# Altium PCB HS-1025_MAIN_PCB增加测试点修改_2025-04-26.pcbdoc (part 1 of 2)
Units mm, origin at the board's own origin, x right, y up, seen from the top; angles counter-clockwise.
Board outline 70 x 96.4 mm, 2 copper layers (Top Layer, Bottom Layer); 113 components, 41 nets, 228 pads, 296 vias.
Unrouted connection lines stored in the file: 1.
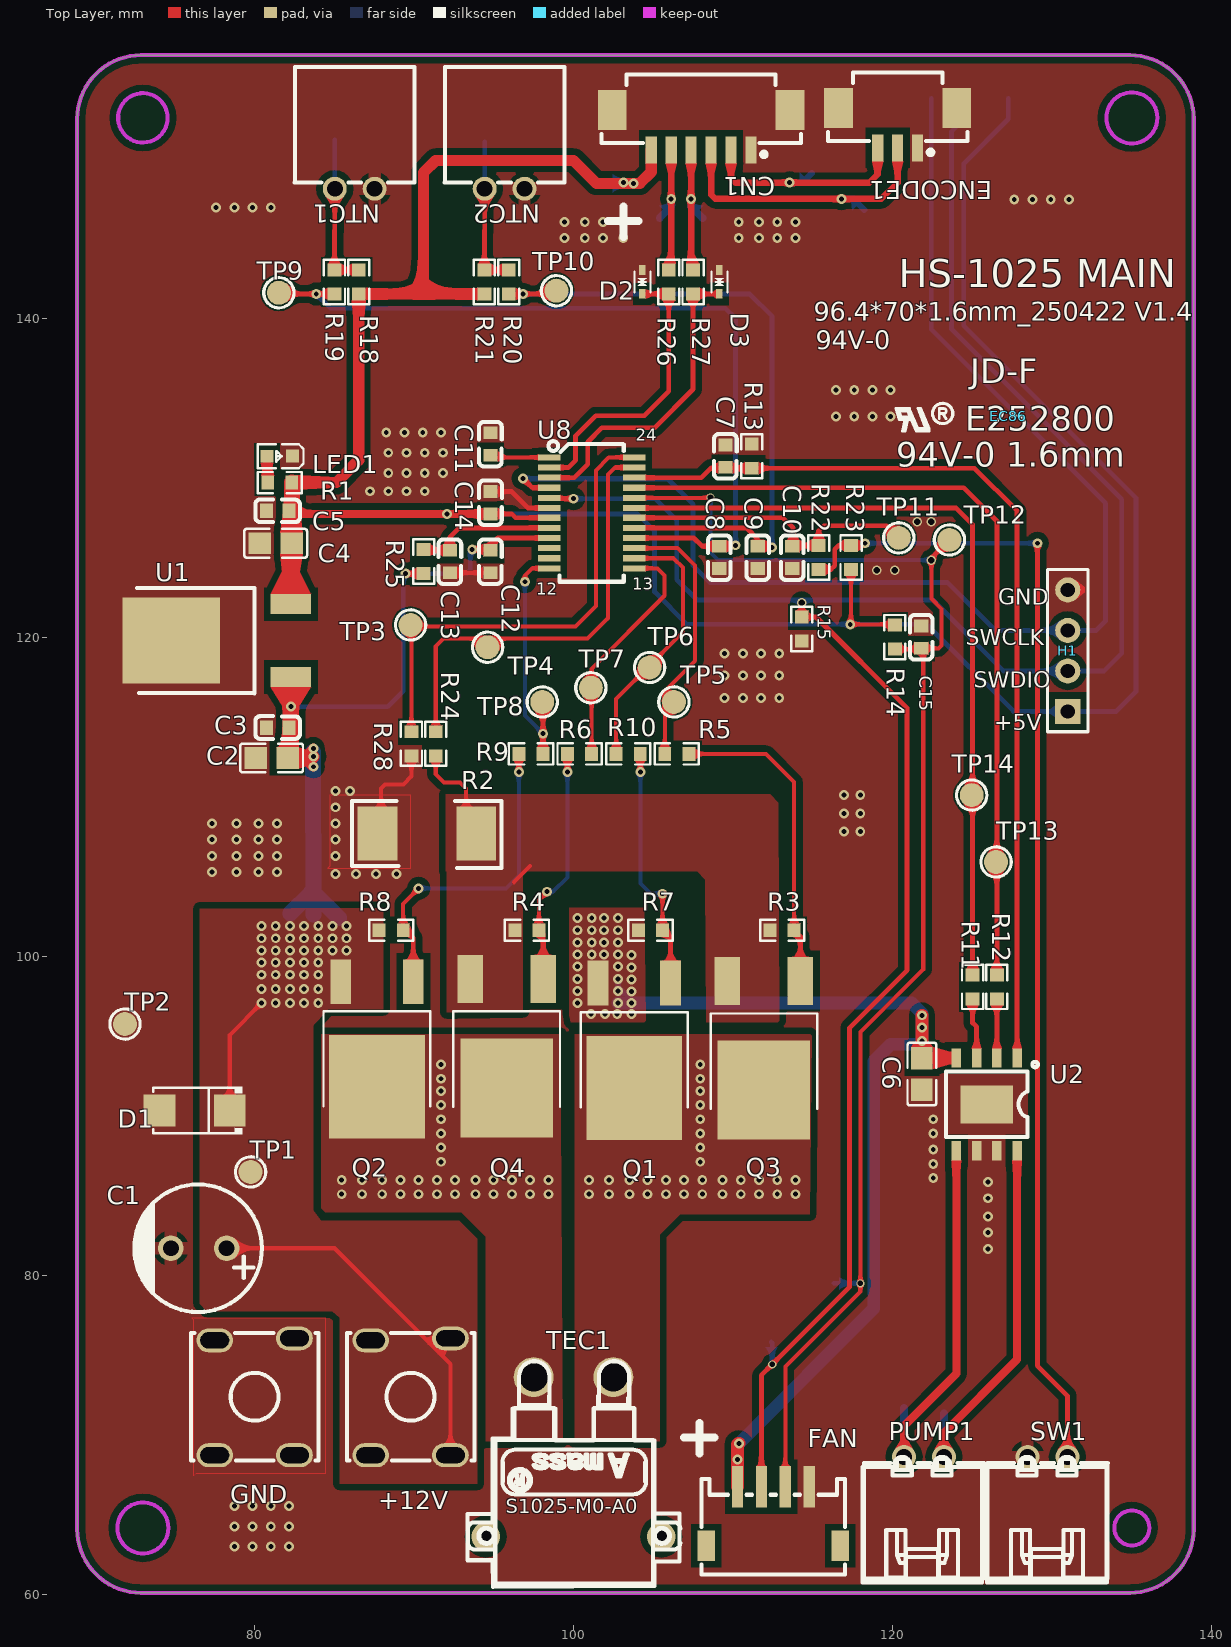
[diagram p0: Top Layer view]
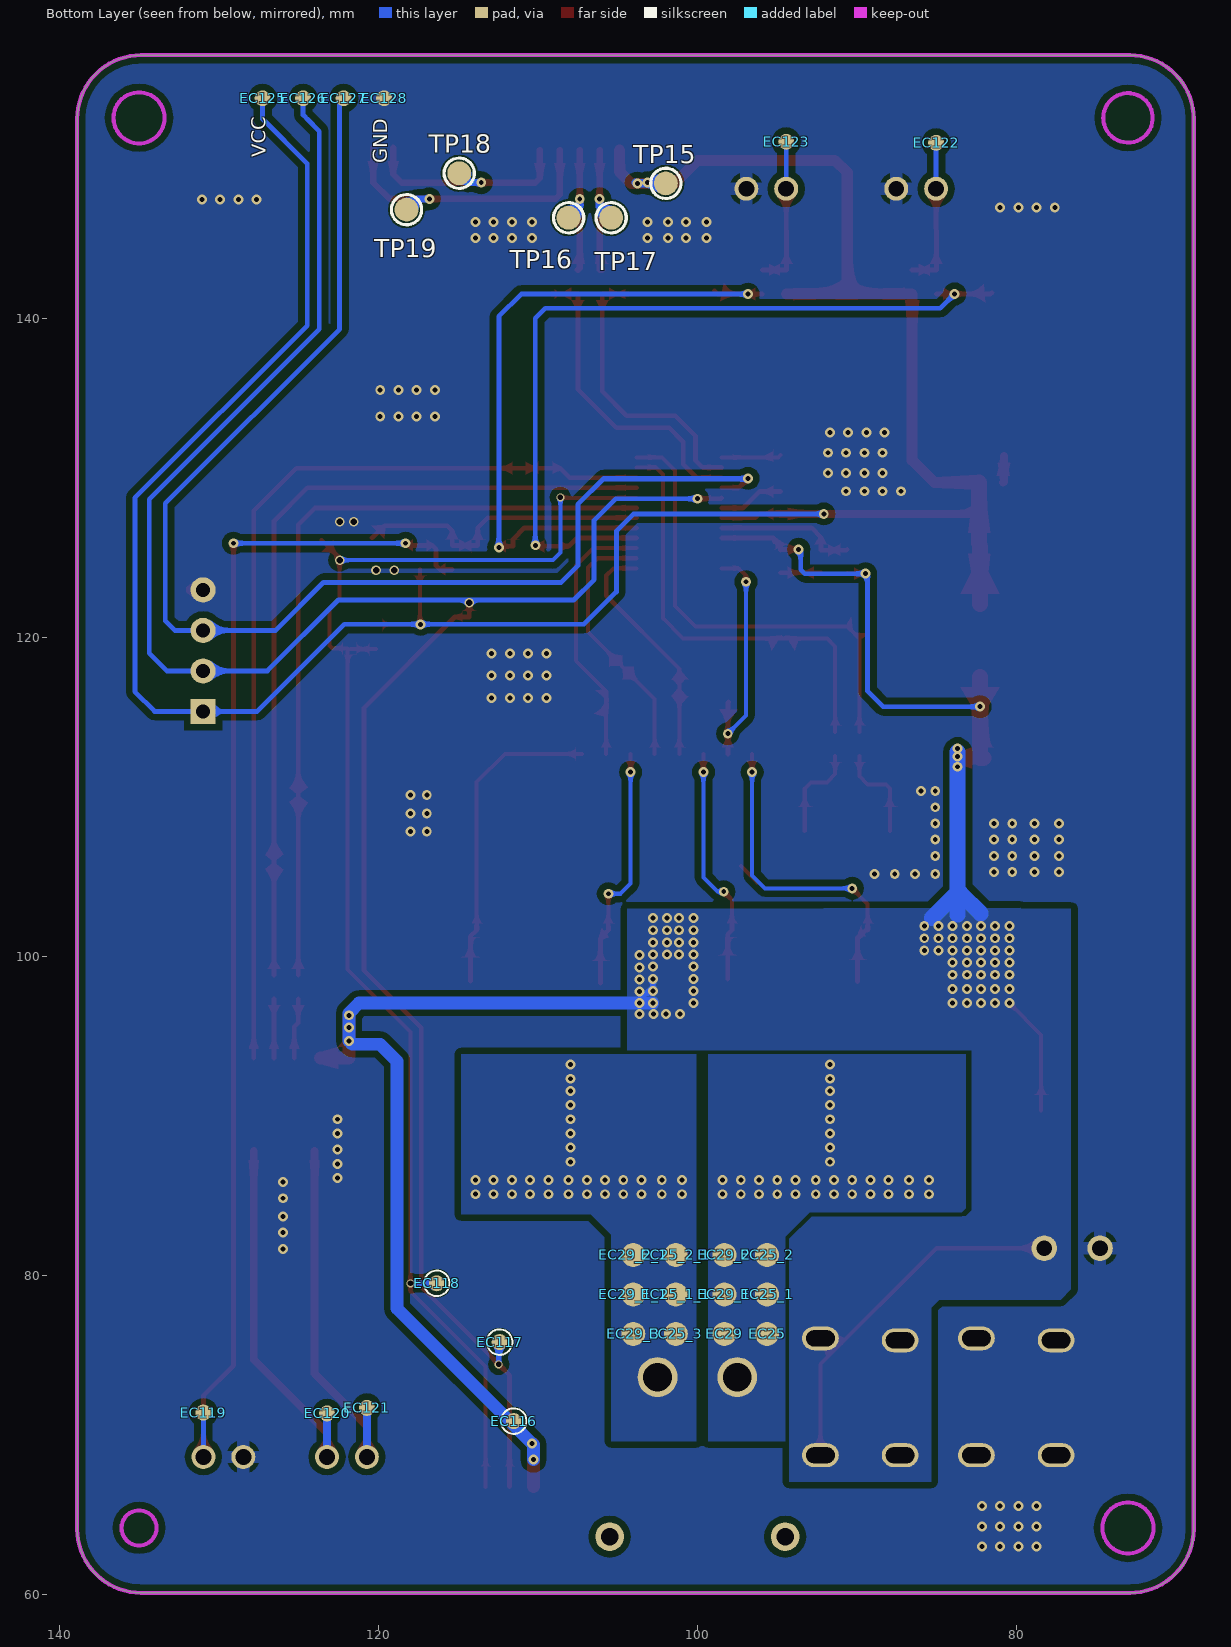
[diagram p1: Bottom Layer view, seen from below]

## Layer stack, top to bottom
Top Solder: solder mask 0.0102, Solder Resist, Dk 3.5
Top Layer: signal copper 0.0356
Dielectric1: dielectric 0.32, FR-4, Dk 4.8
Bottom Layer: signal copper 0.0356
Bottom Solder: solder mask 0.0102, Solder Resist, Dk 3.5

## Board outline
68.878,64.099 ccw(c72.88,64.1) 72.878,60.099 134.878,60.099 ccw(c134.879,64.099) 138.878,64.099 138.878,152.499 ccw(c134.88,152.501) 134.878,156.499 72.878,156.499 ccw(c72.878,152.499) 68.878,152.499 68.879,152.499

## Design rules (kind name [scope] priority, off if disabled: settings)
BoardOutlineClearance [All] p1: gap=0.254 except(0: Arc-SplitContinuation Track-SplitContinuation SMDPad-SplitContinuation THPad-SplitContinuation Via-SplitContinuation Fill-SplitContinuation Poly-SplitContinuation Region-SplitContinuation Text-SplitContinuation; 0.5: Arc-OutlineEdge)
Clearance [All] p1: gap=0.4
PlaneConnect [All] p1: planeconnectstyle=Direct reliefexpansion=0.508 reliefentries=4 reliefconductorwidth=0.254 reliefairgap=0.254
PolygonConnect PolygonConnect_1 [(InComponent('C1')AND InNet('GND')) + (InComponent('NTC1')AND InNet('GND')) +(InComponent('NTC2')AND InNet('GND'))+(InComponent('SW1')AND InNet('GND'))] p1: connectstyle=Relief reliefconductorwidth=0.8 reliefentries=4 polygonreliefangle="90 Angle" airgapwidth=0.3
PolygonConnect [All] p2: connectstyle=Direct reliefconductorwidth=0.254 reliefentries=4 polygonreliefangle="90 Angle" airgapwidth=0.254
RoutingVias [All] p1: holewidth=0.711 width=1.27 viastyle="Through Hole" minholewidth=0.711 minwidth=1.27 maxholewidth=0.711 maxwidth=1.27
SolderMaskExpansion [All] p1: expansion=0.102
Width [All] p1: maxlimit=10 minlimit=0.254 preferedwidth=0.254
29 further rules are at their usual default settings.

## Classes and differential pairs
component class MAIN_250314: +12V C1 C2 C3 C4 C5 C6 C7 C8 C9 C10 C11 C12 C13 C14 C15 CN1 D1 D2 D3 ENCODE1 FAN GND H1 LED1 NTC1 NTC2 PUMP1 Q1 Q2 Q3 Q4 R1 R2 R3 R4 R5 R6 R7 R8 R9 R10 R11 R12 R13 R14 R15 R18 R19 R20 R21 R22 R23 R24 R25 R26 R27 R28 SW1 TEC1 TP1 TP2 TP3 TP4 TP5 TP6 TP7 TP8 TP9 TP10 TP11 TP12 TP13 TP14 TP15 TP16 TP17 TP18 TP19 U1 U2 U8
pad class "New Class": C1-2 NTC1-1 NTC2-1

## Components (designator, comment, footprint, x,y, rotation, side; value= is the part's Value field where it differs from the comment)
+12V "T34080080-0680" CONN-TH_T34080080-0680 89.781,72.39 r270 top
C1 "330uF" CAP-TH_BD8.0-P3.50-D0.6-FD 76.5,81.702 r180 top
C2 "22uF" C0805 81.072,112.436 r0 top
C3 "100nF" C0603 81.453,114.341 r0 top
C4 "22uF" C0805 81.326,125.898 r0 top
C5 "100nF" C0603 81.453,127.93 r0 top
C6 "22uF" C0805 121.839,92.624 r90 top
C7 "100nF" C0603 109.52,131.359 r90 top
C8 "100nF" C0603 109.139,125.009 r90 top
C9 "100nF" C0603 111.552,125.009 r90 top
C10 "100nF" C0603 113.711,125.009 r90 top
C11 "100nF" C0603 94.788,132.121 r90 top
C12 "1uF" C0603 94.788,124.755 r90 top
C13 "1uF" C0603 92.248,124.755 r90 top
C14 "1uF" C0603 94.788,128.438 r270 top
C15 "0.01UF" C0603 121.793,120.015 r90 top
CN1 "ZX-MX1.25-6PWT" CONN-SMD_6P-P1.25_MEGASTAR_ZX-MX1.25-6PWT 107.996,151.806 r0 top
D1 "SMAJ14A_C908768" SMA_L4.3-W2.6-LS5.1-RD 76.246,90.338 r180 top
D2 "PESD3V3S1BA-N" SOD-523_L1.2-W0.8-LS1.6-BI 104.313,142.281 r270 top
D3 "PESD3V3S1BA-N" SOD-523_L1.2-W0.8-LS1.6-BI 109.139,142.281 r270 top
EC25 "Comment" Test-Point-0.5mm#1 144.018,77.343 r180 bottom
EC25_1 "Comment" Test-Point-0.5mm#1 144.018,79.819 r180 bottom
EC25_1_1 "Comment" Test-Point-0.5mm#1 149.733,79.819 r180 bottom
EC25_2 "Comment" Test-Point-0.5mm#1 144.018,82.296 r180 bottom
EC25_2_1 "Comment" Test-Point-0.5mm#1 149.733,82.296 r180 bottom
EC25_3 "Comment" Test-Point-0.5mm#1 149.733,77.343 r180 bottom
EC26 "Comment" Test-Point-0.5mm#2 144.018,80.637 r180 bottom
EC27 "Comment" Test-Point-0.5mm#2 150.241,77.343 r180 bottom
EC28 "Comment" Test-Point-0.5mm#2 150.114,80.637 r180 bottom
EC29 "Comment" Test-Point-0.5mm#3 110.236,71.755 r180 bottom
EC29_1 "Comment" Test-Point-0.5mm#3 110.236,74.231 r180 bottom
EC29_1_1 "Comment" Test-Point-0.5mm#3 115.951,74.231 r180 bottom
EC29_2 "Comment" Test-Point-0.5mm#3 110.236,76.708 r180 bottom
EC29_2_1 "Comment" Test-Point-0.5mm#3 115.951,76.708 r180 bottom
EC29_3 "Comment" Test-Point-0.5mm#3 115.951,71.755 r180 bottom
EC30 "Comment" Test-Point-0.5mm#2 149.098,76.2 r180 bottom
EC85 "Comment" 版本修改 69.977,174.752 r0 top
EC86 "Comment" JD2 127.254,133.858 r0 top
EC87 "Comment" 工艺要求FR4双面 112.141,30.988 r0 top
EC116 "Comment" 1.0MM测试点 111.506,70.866 r180 bottom
EC117 "Comment" 1.0MM测试点 112.395,75.819 r180 bottom
EC118 "Comment" 1.0MM测试点 116.332,79.502 r180 bottom
EC119 "Comment" Test-Point-1.0mm 130.963,71.4 r180 bottom
EC120 "Comment" Test-Point-1.0mm 123.216,71.348 r180 bottom
EC121 "Comment" Test-Point-1.0mm 120.716,71.694 r180 bottom
EC122 "Comment" Test-Point-1.0mm 85.029,151.003 r180 bottom
EC123 "Comment" Test-Point-1.0mm 94.427,151.069 r180 bottom
EC125 "Comment" Test-Point-1.0mm 127.254,153.797 r270 bottom
EC126 "Comment" Test-Point-1.0mm 124.714,153.797 r270 bottom
EC127 "Comment" Test-Point-1.0mm 122.174,153.797 r270 bottom
EC128 "Comment" Test-Point-1.0mm 119.634,153.797 r270 bottom
ENCODE1 "ZX-MX1.25-3PWT" CONN-SMD_3P-P1.25_MEGASTAR_ZX-MX1.25-3PWT 120.315,151.933 r180 top
FAN "CON4" CONN-SMD_4P-P1.50_HC-ZH-4PW 112.522,64.897 r180 top
GND "T34080080-0680" CONN-TH_T34080080-0680 80.003,72.391 r270 top
H1 "HDR-F-2.54_1x4" HDR-F-2.54_1X4 130.983,119.167 r90 top
LED1 "XL-1608SURC-06" LED0603-RD_RED 81.58,131.359 r180 top
NTC1 "XY-XHB2.54-2A21" HDR-TH_2P-P2.50-H-F-W7.3-N 86.279,148.123 r180 top
NTC2 "XY-XHB2.54-2A21" HDR-TH_2P-P2.50-H-F-W7.3-N 95.677,148.123 r180 top
PUMP1 "XY-XHB2.54-2A21" HDR-TH_2P-P2.50-H-F-W7.3-N 121.966,68.621 r0 top
Q1 "HY19P03D" TO-252-2_L6.6-W6.1-P4.57-LS9.9-TL-CW 103.805,95.037 r270 top
Q2 "HY19P03D" TO-252-2_L6.6-W6.1-P4.57-LS9.9-TL-CW 87.676,95.112 r270 top
Q3 "MDD50N03D" TO-252-2_L6.6-W6.1-P4.57-LS9.9-BR-CW 111.933,95.037 r90 top
Q4 "MDD50N03D" TO-252-2_L6.6-W6.1-P4.57-LS9.9-BR-CW 95.804,95.164 r90 top
R1 "1kΩ" R0603 81.58,129.708 r180 top
R2 "5mΩ" RES-SMD_L6.4-W3.2-1 90.797,107.696 r0 top
R3 "10kΩ" R0603 113.076,101.641 r0 top
R4 "10kΩ" R0603 97.074,101.641 r0 top
R5 "51Ω" R0603 106.471,112.69 r0 top
R6 "51Ω" R0603 100.375,112.69 r0 top
R7 "10kΩ" R0603 104.821,101.641 r0 top
R8 "10kΩ" R0603 88.565,101.641 r0 top
R9 "51Ω" R0603 97.327,112.69 r0 top
R10 "51Ω" R0603 103.423,112.69 r0 top
R11 "51Ω" R0603 125.013,98.085 r270 top
R12 "51Ω" R0603 126.537,98.085 r270 top
R13 "10kΩ" R0603 111.171,131.359 r90 top
R14 "2.4K" R0603 120.142,120.015 r270 top
R15 "NC" r0603 114.3,120.523 r90 top
R18 "10kΩ" R0603 86.533,142.281 r270 top
R19 "1kΩ" R0603 85.009,142.281 r90 top
R20 "1kΩ" R0603 95.931,142.281 r90 top
R21 "10kΩ" R0603 94.407,142.281 r270 top
R22 "1kΩ" R0603 115.362,125.009 r270 top
R23 "10kΩ" R0603 117.394,125.009 r270 top
R24 "1kΩ" R0603 91.359,113.325 r90 top
R25 "1kΩ" R0603 90.597,124.755 r90 top
R26 "100Ω" R0603 105.964,142.281 r270 top
R27 "100Ω" R0603 107.488,142.281 r270 top
R28 "1kΩ" R0603 89.835,113.325 r90 top
SW1 "XY-XHB2.54-2A21" HDR-TH_2P-P2.50-H-F-W7.3-N 129.713,68.621 r0 top
TEC1 "XT30PW-M" CONN-TH_XT30PW-M 99.995,68.621 r0 top
TP1 "TP-1.5MM" TP_1.5MM 79.748,86.487 r0 top
TP2 "TP-1.5MM" TP_1.5MM 71.874,95.758 r0 top
TP3 "TP-1.5MM" TP_1.5MM 89.781,120.777 r0 top
TP4 "TP-1.5MM" TP_1.5MM 94.607,119.38 r0 top
TP5 "TP-1.5MM" TP_1.5MM 106.291,115.951 r0 top
TP6 "TP-1.5MM" TP_1.5MM 104.767,118.11 r0 top
TP7 "TP-1.5MM" TP_1.5MM 101.084,116.84 r0 top
TP8 "TP-1.5MM" TP_1.5MM 98.036,115.951 r0 top
TP9 "TP-1.5MM" TP_1.5MM 81.526,141.605 r0 top
TP10 "TP-1.5MM" TP_1.5MM 98.925,141.732 r0 top
TP11 "TP-1.5MM" TP_1.5MM 120.388,126.238 r0 top
TP12 "TP-1.5MM" TP_1.5MM 123.563,126.111 r0 top
TP13 "TP-1.5MM" TP_1.5MM 126.484,105.918 r0 top
TP14 "TP-1.5MM" TP_1.5MM 124.96,110.109 r0 top
TP15 "TP-1.5MM" TP_1.5MM 101.973,148.463 r0 bottom
TP16 "TP-1.5MM" TP_1.5MM 108.069,146.304 r0 bottom
TP17 "TP-1.5MM" TP_1.5MM 105.402,146.304 r0 bottom
TP18 "TP-1.5MM" TP_1.5MM 114.927,149.098 r0 bottom
TP19 "TP-1.5MM" TP_1.5MM 118.229,146.812 r0 bottom
U1 "L78M05CDT-TR" TO-252-3_L6.5-W5.8-P4.58-BL 78.532,119.802 r90 top
U2 "MX1618" ESOP-8_L4.9-W3.9-P1.27-LS6.0-BL-EP 125.903,90.719 r180 top
U8 "CMS32M6526CGE24SS" SSOP24-0.635-8.65X4MM 101.137,127.803 r270 top

## Footprints (in the part's own frame and the unit in brackets; to place one, negate y for a bottom-side part, rotate by r counter-clockwise, add the part's x,y. Pads: shape width x height; smd on the part's side, far side on the other; paste and mask are expansions set on the pad)
1.0MM测试点 [mm]
  round 1 smd: 1(0,0)
  silkscreen extent -0.8,-0.8 0.8,0.8
C0603 [mm]
  rect 0.8x0.9 smd paste+0 mask+0.051: 1(-0.7,0) 2(0.7,0)
  silkscreen extent -1.41,-0.71 1.39,0.72
C0805 [mm]
  rect 1.41x1.35 smd paste-100 mask+0.051: 1(-1,0) 2(1,0)
  silkscreen extent -1.96,-0.9 1.96,0.9
CAP-TH_BD8.0-P3.50-D0.6-FD [mm]
  round 1.6 hole 1 paste+0 mask+0.051: 1(-1.75,0) 2(1.75,0)
  silkscreen extent -3.96,-4 4.04,4
CONN-SMD_3P-P1.25_MEGASTAR_ZX-MX1.25-3PWT [mm]
  rect 0.7x1.7 smd paste+0 mask+0.05: 1(-1.25,1.25) 2(0,1.25) 3(1.25,1.25)
  rect 1.8x2.5 smd paste+0 mask+0.05: 4(-3.7,-1.25) 5(3.7,-1.25)
  silkscreen extent -4.37,-3.47 4.37,1.67
CONN-SMD_4P-P1.50_HC-ZH-4PW [mm] "卧式"
  rect 0.7x2.6 smd paste+0 mask+0.05: 1(-2.25,-1.85) 2(-0.75,-1.85) 3(0.75,-1.85) 4(2.25,-1.85)
  rect 1.1x1.9 smd paste+0 mask+0.05: 5(4.2,1.85) 6(-4.2,1.85)
  silkscreen extent -4.5,-2.35 4.5,3.65
CONN-SMD_6P-P1.25_MEGASTAR_ZX-MX1.25-6PWT [mm]
  rect 0.7x1.7 smd paste+0 mask+0.05: 1(3.125,-1.25) 2(1.875,-1.25) 3(0.625,-1.25) 4(-0.625,-1.25) 5(-1.875,-1.25) 6(-3.125,-1.25)
  rect 1.8x2.5 smd paste+0 mask+0.05: 7(-5.575,1.25) 8(5.575,1.25)
  silkscreen extent -6.25,-1.67 6.25,3.48
CONN-TH_T34080080-0680 [mm]
  oval 1.5x2.3 hole 1 slot 1.8 at 90 deg paste+0 mask+0.051: 1(-3.536,-2.5) 2(3.664,-2.5) 3(3.664,2.5) 4(-3.663,2.5)
  silkscreen extent -4,-4 4,4
CONN-TH_XT30PW-M [mm]
  round 2.5 hole 1.8 paste+0 mask+0.051: 1(-2.5,5) 2(2.5,5)
  round 1.8 hole 1.1 paste+0 mask+0.051: 3(5.5,-5) 4(-5.5,-5)
  silkscreen extent -6.65,-8.15 6.65,3.81
ESOP-8_L4.9-W3.9-P1.27-LS6.0-BL-EP [mm]
  rect 0.6x1.2 smd paste+0 mask+0.051: 1(-1.905,-2.908) 2(-0.635,-2.908) 3(0.635,-2.908) 4(1.905,-2.908) 5(1.905,2.908) 6(0.635,2.908) 7(-0.635,2.908) 8(-1.905,2.908)
  rect 3.3x2.4 smd paste+0 mask+0.051: 9(0,0)
  silkscreen extent -3.2,-2.67 2.55,2.05
HDR-F-2.54_1X4 [mil]
  rect 62x62 hole 35 paste+0 mask+2: 1(-150,0)
  round 62 hole 35 paste+0 mask+2: 2(-50,0) 3(50,0) 4(150,0)
  silkscreen extent -200,-50 200,50
HDR-TH_2P-P2.50-H-F-W7.3-N [mm]
  round 1.5 hole 1 paste+0 mask+0.05: 1(-1.25,0) 2(1.25,0)
  silkscreen extent -3.75,-7.63 3.78,-0.38
JD2 [mm] "骏达丝印"
  silkscreen extent -7.07,-0.95 -3.48,0.81
LED0603-RD_RED [mm]
  rect 0.8x0.8 smd paste+0 mask+0.051: 1(-0.799,-0.003) 2(0.799,0.004)
  silkscreen extent -1.49,-0.75 1.39,0.76
R0603 [mm]
  rect 0.806x0.864 smd paste-100 mask+0.051: 1(-0.753,0) 2(0.753,0)
  silkscreen extent -1.39,-0.66 1.39,0.66
r0603 [mm]
  rect 0.806x0.864 smd paste-100 mask+0.051: 1(-0.753,0) 2(0.753,0)
  silkscreen extent -1.39,-0.66 1.39,0.66
RES-SMD_L6.4-W3.2-1 [mm]
  rect 2.5x3.4 smd paste+0 mask+0.051: 1(-3.1,0) 2(3.1,0)
  silkscreen extent -4.69,-2.16 4.69,2.03
SMA_L4.3-W2.6-LS5.1-RD [mm]
  rect 2x2 smd paste+0 mask+0.051: 1(-2.2,0) 2(2.2,0)
  silkscreen extent -2.98,-1.5 2.6,1.5
SOD-523_L1.2-W0.8-LS1.6-BI [mm]
  rect 0.6x0.4 smd paste+0 mask+0.051: 1(-0.75,0) 2(0.75,0)
  silkscreen extent -0.65,-0.5 0.65,0.5
SSOP24-0.635-8.65X4MM [mil]
  rect 15x55 smd paste+0 mask+2: 1(-137,-105) 2(-112,-105) 3(-87,-105) 4(-62,-105) 5(-37,-105) 6(-12,-105) 7(12,-105) 8(37,-105) 9(62,-105) 10(87,-105) 11(112,-105) 12(137,-105) 13(137,105) 14(112,105) 15(87,105) 16(62,105) 17(37,105) 18(12,105) 19(-12,105) 20(-37,105) 21(-62,105) 22(-87,105) 23(-112,105) 24(-137,105)
  silkscreen extent -177,-107 170,79
Test-Point-0.5mm#1 [mm]
  round 1.5 smd: 1(48.387,-1.016)
Test-Point-0.5mm#2 [mm]
Test-Point-0.5mm#3 [mm]
  round 1.5 smd: 1(11.938,4.572)
Test-Point-1.0mm [mm]
  round 1 smd: 1(0,0)
TO-252-2_L6.6-W6.1-P4.57-LS9.9-BR-CW [mm]
  rect 3x1.6 smd paste+0 mask+0.051: 1(3.424,-2.29) 3(3.424,2.29)
  rect 6.2x5.8 smd paste+0 mask+0.051: 2(-3.424,0)
  silkscreen extent -4.58,-3.35 1.38,3.35
TO-252-2_L6.6-W6.1-P4.57-LS9.9-TL-CW [mm]
  rect 2.8x1.3 smd paste+0 mask+0.051: 1(-3.292,2.273) 3(-3.292,-2.273)
  rect 6.5x6 smd paste+0 mask+0.051: 2(3.292,0)
  silkscreen extent -1.46,-3.35 4.51,3.34
TO-252-3_L6.5-W5.8-P4.58-BL [mm]
  rect 1.27x2.54 smd paste+0 mask+0.051: 1(-2.288,-3.747) 3(2.288,-3.745)
  rect 5.4x6.1 smd paste+0 mask+0.051: 2(-0.002,3.747)
  silkscreen extent -3.31,-1.46 3.3,5.9
TP_1.5MM [mm]
  round 1.5 smd paste+0 mask+0.051: 1(0,0)
  silkscreen extent -0.95,-0.95 0.95,0.95
工艺要求FR4双面 [mil]
  round 5 on Top Overlay: 1(-831.3,398.3) 1(-831.3,603.02) 1(-831.3,799.87) 1(2977.08,398.3)
  silkscreen extent -2977,-800 2977,800
版本修改 [mm]
  silkscreen extent 0,-11.51 49.28,0

## Part data
C15: library part CAP, "Capacitor"
FAN: "Connector"
R14 R15: library part RES-SMD

## Via types
v1: diameter 0.62, hole 0.31, Top Layer to Bottom Layer, tented both sides, 285 vias
v2: diameter 0.6, hole 0.406, Top Layer to Bottom Layer, 5 vias
v3: diameter 0.62, hole 0.31, Top Layer to Bottom Layer, 2 vias
v4: diameter 0.508, hole 0.35, Top Layer to Bottom Layer, 2 vias
v5: diameter 0.5, hole 0.35, Top Layer to Bottom Layer, 1 vias
v6: diameter 0.6, hole 0.4, Top Layer to Bottom Layer, 1 vias

## Nets (pads, with @x,y where several pads share a name; then routed paths per layer and width w, separated by ;. In a path a pad name is that pad's centre, name@x,y a point inside that pad or via, vN(x,y) a via of type N, cw(c..) or ccw(c..) an arc to the next point about the centre after c; other vN are vias at no path point)
+12V: +12V.1 +12V.2 +12V.3 +12V.4 C1.1 C2.2 C3.2 C6.2 C12.2 D1.1 FAN.4 Q1.3 Q2.3 R7.1 R8.1 R25.1 TP1.1 U1.1 U2.4 U8.9 | length 143
  Top Layer w0.254: C1.1@78.25,81.702 85.008,81.702 92.28,74.43 +12V.3@92.281,68.726 ; D1.1@78.446,90.338 78.445,95.077 v1(80.437,97.069)
  Top Layer w0.3: v1(89.454,123.993) 90.589,123.993 R25.1@90.597,124.002 ; v1(93.645,125.517) 94.726,125.517 C12.2@94.788,125.455 94.787,125.771 95.244,126.228 U8.9@98.47,126.228
  Top Layer w0.6: v1(83.685,111.887) 83.136,112.436 C2.2@82.072,112.436 82.285,112.649 83.304,112.649 v1(83.685,113.03)
  Top Layer w0.8: C2.2@82.072,112.436 83.599,112.436 v1(83.685,112.522) ; FAN.4@110.272,66.747 v3(110.272,68.453) 110.272,69.378 cw(c110.363,69.378) v3(110.363,69.469) ; v1(121.839,94.693) v1(121.839,96.307) ; v1(121.839,94.693) C6.2@121.839,93.624 123.616,93.624
  Top Layer w1: C2.2@82.072,112.436 82.278,112.436 U1.1@82.279,117.514
  Bottom Layer w0.254: v1(102.789,98.593) 102.789,98.117 v1@103.837,97.069
  Bottom Layer w0.3: v1(82.279,115.654) 88.354,115.654 89.327,116.627 89.327,123.866 v1(89.454,123.993) 93.264,123.993 93.518,124.247 93.518,125.39 v1(93.645,125.517)
  Bottom Layer w0.8: v1(102.789,97.069) 121.204,97.069 121.839,96.434 v1@121.839,94.801 ; v3(110.363,69.469) 118.823,77.929 118.823,93.423 119.888,94.488 121.634,94.488 v1(121.839,94.693)
  Bottom Layer w1: 82.236,102.691 83.506,103.961 ; v1@83.677,112.805 83.685,102.616 ; 83.811,103.885 85.284,102.417
  other v1: 121.839,95.545 101.084,96.393 101.973,96.393 102.735,96.393 103.624,96.393 81.326,97.069 82.215,97.069 83.104,97.069 83.993,97.069 100.249,97.069 103.63,97.069 103.624,97.79 100.249,97.831 102.789,97.831 80.437,97.958 81.326,97.958 82.215,97.958 83.104,97.958 83.993,97.958 103.624,98.552 100.249,98.593 80.437,98.847 81.326,98.847 82.215,98.847 83.104,98.847 83.993,98.847 103.624,99.314 100.249,99.355 102.789,99.355 80.437,99.609 81.326,99.609 82.215,99.609 83.104,99.609 83.993,99.609 103.624,100.076 100.249,100.117 101.138,100.117 101.9,100.117 102.789,100.117 80.437,100.371 81.326,100.371 82.215,100.371 83.104,100.371 83.993,100.371 84.882,100.371 85.771,100.371 100.249,100.879 101.138,100.879 101.9,100.879 102.789,100.879 80.437,101.133 81.326,101.133 82.215,101.133 83.104,101.133 83.993,101.133 84.882,101.133 85.771,101.133 100.249,101.641 101.138,101.641 101.9,101.641 102.789,101.641 80.437,101.895 81.326,101.895 82.215,101.895 83.104,101.895 83.993,101.895 84.882,101.895 85.771,101.895 100.249,102.403 101.138,102.403 101.9,102.403 102.789,102.403
GND: C1.2 C2.1 C3.1 C4.1 C5.1 C6.1 C7.2 C8.1 C9.1 C10.1 C11.2 C12.1 C13.1 C14.1 C15.2 CN1.1 CN1.7 CN1.8 D1.2 D2.1 D3.1 EC128.1 ENCODE1.1 ENCODE1.4 ENCODE1.5 FAN.1 GND.1 GND.2 GND.3 GND.4 H1.4 LED1.1 NTC1.1 NTC2.1 R2.1 R13.2 R15.1 R28.1 SW1.1 TP2.1 U1.2 U2.6 U2.7 U2.9 U8.6 | length 12.8
  Top Layer w0.254: R2.1@87.929,107.864 87.929,110.531 88.183,110.785 89.326,110.785 89.834,111.293 R28.1@89.835,112.572
  Top Layer w0.3: C13.1@92.247,124.054 C12.1@94.787,124.054 ; C14.1@94.788,129.138 96.121,129.139 97.149,128.107 U8.6@98.47,128.107
  other v1: 78.732,62.992 79.875,62.992 81.018,62.992 82.161,62.992 78.732,64.262 79.875,64.262 81.018,64.262 82.161,64.262 78.732,65.532 79.875,65.532 81.018,65.532 82.161,65.532 125.976,81.661 125.976,82.677 125.976,83.693 125.976,84.836 125.976,85.852 122.547,86.106 122.547,86.995 122.547,87.884 122.547,88.9 122.547,89.789 85.082,105.156 86.352,105.156 87.622,105.156 88.892,105.156 77.335,105.283 78.859,105.283 80.256,105.283 81.399,105.283 77.335,106.299 78.859,106.299 80.256,106.299 81.399,106.299 85.082,106.299 77.335,107.315 78.859,107.315 80.256,107.315 81.399,107.315 85.082,107.315 116.959,107.823 117.975,107.823 77.335,108.331 78.859,108.331 80.256,108.331 81.399,108.331 85.082,108.331 116.959,108.966 117.975,108.966 85.082,109.347 116.959,110.109 117.975,110.109 85.082,110.363 85.971,110.363 109.466,116.205 110.609,116.205 111.752,116.205 112.895,116.205 109.466,117.602 110.609,117.602 111.752,117.602 112.895,117.602 109.466,118.999 110.609,118.999 111.752,118.999 112.895,118.999 87.241,129.159 88.384,129.159 89.527,129.159 90.67,129.159 88.384,130.302 89.527,130.302 90.67,130.302 91.813,130.302 88.384,131.572 89.527,131.572 90.67,131.572 91.813,131.572 88.257,132.842 89.4,132.842 90.543,132.842 91.686,132.842 116.451,133.858 117.594,133.858 118.737,133.858 119.88,133.858 116.451,135.509 117.594,135.509 118.737,135.509 119.88,135.509 99.433,145.034 100.703,145.034 101.846,145.034 103.116,145.034 110.355,145.034 111.625,145.034 112.768,145.034 113.911,145.034 99.433,146.05 100.703,146.05 101.846,146.05 103.116,146.05 110.355,146.05 111.625,146.05 112.768,146.05 113.911,146.05 77.589,146.939 78.732,146.939 79.875,146.939 81.018,146.939 127.627,147.447 128.77,147.447 129.913,147.447 131.056,147.447
  other v2: 118.999,124.206 120.142,124.206 121.539,127.254 122.428,127.254
NetC7_1: C7.1 R13.1 U2.1 U8.22 | length 59.7
  Top Layer w0.3: U8.22@103.804,130.012 107.995,130.012 108.59,130.607 R13.1@111.171,130.606 125.133,130.607 127.807,127.93 U2.1@127.808,93.627
NetC8_2: C8.2 R19.1 TP9.1 U8.16 | length 52.4
  Top Layer w0.3: TP9.1@81.526,141.605 81.602,141.529 R19.1@85.009,141.528 v1(83.866,141.528) ; U8.16@103.804,126.228 107.538,126.228 108.059,125.71 C8.2@109.139,125.709 110.093,125.71 v1(110.155,125.771)
  Bottom Layer w0.3: v1(83.866,141.528) 84.763,140.63 109.52,140.63 110.155,139.995 v1(110.155,125.771)
NetC9_2: C9.2 R20.1 TP10.1 U8.17 | length 44.1
  Top Layer w0.3: v1(96.82,141.519) 95.94,141.519 R20.1@95.931,141.528 98.722,141.529 TP10.1@98.925,141.732 ; U8.17@103.804,126.863 110.84,126.863 111.551,126.152 C9.2@111.552,125.709 112.377,125.71 v1(112.441,125.644)
  Bottom Layer w0.3: v1(96.82,141.519) 111.044,141.519 112.441,140.122 v1(112.441,125.644)
NetC10_2: C10.2 R22.1 TP11.1 U8.18 | length 19.3
  Top Layer w0.3: U8.18@103.804,127.498 113.126,127.498 113.764,126.86 113.764,125.763 R22.1@115.362,125.762 115.361,126.672 115.689,127 119.626,127 TP11.1@120.388,126.238
NetC11_1: C11.1 U8.1 | length 3.7
  Top Layer w0.254: C11.1@94.788,131.421 94.926,131.282 U8.1@98.47,131.282
NetC13_2: C13.2 R25.2 U8.8 | length 9
  Top Layer w0.3: R25.2@90.597,125.508 90.65,125.456 C13.2@92.248,125.455 92.247,126.279 92.831,126.863 U8.8@98.47,126.863
NetC15_1: C15.1 FAN.2 R14.2 TP12.1 U8.20 | length 88.6
  Top Layer w0.254: U8.20@103.804,128.742 108.549,128.742 v5(108.585,128.778) ; FAN.2@113.272,66.747 113.272,74.283 117.983,78.994 117.983,95.25 121.92,99.187 C15.1@121.92,119.262 ; R14.2@120.142,119.262 C15.1@121.74,119.262 ; C15.1@121.92,119.315 122.871,119.315 123.059,119.503 123.059,121.789 122.428,122.42 v2(122.428,124.841) 122.428,124.976 TP12.1@123.563,126.111
  Bottom Layer w0.254: v5(108.585,128.778) 108.585,125.309 109.053,124.841 v2(122.428,124.841)
  other v4: 117.983,79.502
NetCN1_2: CN1.2 ENCODE1.3 TP18.1 | length 14.6
  Top Layer w0.4: CN1.2@109.871,150.556 109.87,148.788 110.154,148.504 v1(113.545,148.504) 118.536,148.504 119.065,149.032 ENCODE1.3@119.065,150.683
  Bottom Layer w0.4: v1(113.545,148.504) 114.333,148.504 TP18.1@114.927,149.098
NetCN1_3: CN1.3 ENCODE1.2 TP19.1 | length 18.9
  Top Layer w0.4: CN1.3@108.621,150.556 108.62,147.752 108.884,147.488 v1(116.793,147.488) 119.298,147.488 120.314,148.504 ENCODE1.2@120.315,150.683
  Bottom Layer w0.4: v1(116.793,147.488) 117.553,147.488 TP19.1@118.229,146.812
NetCN1_4: CN1.4 R27.1 TP16.1 | length 9
  Top Layer w0.4: CN1.4@107.371,150.556 v1(107.37,147.47) 107.37,143.152 R27.1@107.488,143.034
  Bottom Layer w0.5: v1(107.37,147.47) 107.37,147.002 TP16.1@108.069,146.304
NetCN1_5: CN1.5 R26.1 TP17.1 | length 9.2
  Top Layer w0.4: R26.1@105.964,143.034 106.121,143.035 v1(106.121,147.489) CN1.5@106.121,150.556
  Bottom Layer w0.5: TP17.1@105.402,146.304 106.121,147.023 v1(106.121,147.489)
NetD2_2: D2.2 R26.2 U8.2 | length 18.1
  Top Layer w0.3: U8.2@98.47,130.647 99.664,130.647 100.121,131.105 100.121,132.629 101.391,133.899 104.439,133.899 105.963,135.423 R26.2@105.964,141.528 D2.2@104.313,141.531
NetD3_2: D3.2 R27.2 U8.3 | length 19.8
  Top Layer w0.3: U8.3@98.47,130.012 100.045,130.012 100.883,130.851 100.883,132.248 101.772,133.137 105.074,133.137 107.487,135.55 R27.2@107.488,141.528 108.757,141.529 108.762,141.531 D3.2@109.139,141.531
NetFAN_3: FAN.3 H1.2 R15.2 U8.5 | length 144
  Top Layer w0.3: U8.5@98.47,128.742 98.521,128.692 v1(99.995,128.692) ; FAN.3@111.772,66.747 111.772,73.74 117.306,79.274 117.306,95.53 120.904,99.128 120.904,115.57 115.198,121.276 R15.2@114.3,121.276 v6(114.3,122.174)
  Bottom Layer w0.3: v1(99.995,128.692) 105.107,128.692 106.472,127.327 106.472,123.612 107.742,122.342 v6@114.468,122.342 ; v6(114.3,122.174) v6@114.468,122.342 ; 124.46,152.497 123.698,151.735 123.698,139.319 134.366,128.651 134.366,118.999 133.264,117.897 H1.2@130.983,117.897 126.951,117.897 122.506,122.342 v6@114.468,122.342
  other v4: 112.454,74.422
NetH1_3: H1.3 U8.4 | length 80.3
  Bottom Layer w0.3: v1(96.82,129.962) 96.861,129.921 105.91,129.921 107.488,128.343 107.488,124.501 108.545,123.444 123.436,123.444 126.443,120.437 H1.3@130.983,120.437 132.756,120.437 133.35,121.031 133.35,128.397 122.428,139.319 122.428,153.797
NetLED1_2: LED1.2 R1.2 | length 1.7
  Top Layer w0.5: LED1.2@80.78,131.355 80.779,129.753 R1.2@80.827,129.708
NetNTC1_2: NTC1.2 R18.1 R19.2 | length 9.7
  Top Layer w0.3: NTC1.2@85.029,148.123 R19.2@85.009,143.034 R18.1@86.533,143.034
  Bottom Layer w0.3: NTC1.2@85.029,148.123 85.029,151.196
NetNTC2_2: NTC2.2 R20.2 R21.1 | length 9.6
  Top Layer w0.3: NTC2.2@94.427,148.123 R21.1@94.407,143.034 R20.2@95.931,143.034
  Bottom Layer w0.3: NTC2.2@94.427,148.123 94.427,151.069
NetPUMP1_1: PUMP1.1 U2.5 | length 23.6
  Top Layer w0.5: PUMP1.1@120.716,68.621 120.716,70.559 123.997,73.84 U2.5@123.998,87.811
  Bottom Layer w0.5: PUMP1.1@120.716,68.621 120.716,71.694
NetPUMP1_2: PUMP1.2 U2.8 | length 23.8
  Top Layer w0.5: PUMP1.2@123.216,68.621 123.215,70.137 127.807,74.729 U2.8@127.808,87.811
  Bottom Layer w0.5: PUMP1.2@123.216,68.621 123.216,71.348
NetQ1_1: Q1.1 R7.2 R10.2 | length 15.6
  Top Layer w0.254: R10.2@104.178,112.69 v1(104.186,111.547) ; R7.2@105.574,101.641 v1(105.574,103.927)
  Top Layer w0.3: R7.2@105.574,101.641 106.078,101.138 Q1.1@106.078,98.329
  Bottom Layer w0.254: v1(104.186,111.547) 104.186,104.562 104.821,103.927 v1(105.574,103.927)
NetQ2_1: Q2.1 R8.2 R9.1 | length 20.8
  Top Layer w0.254: R8.2@89.318,101.641 89.319,103.297 v1(90.289,104.267) ; v1(96.566,111.547) R9.1@96.575,112.69
  Top Layer w0.3: R8.2@89.318,101.641 89.453,101.641 89.949,101.145 Q2.1@89.949,98.404
  Bottom Layer w0.254: v1(90.289,104.267) 95.763,104.267 96.566,105.07 v1(96.566,111.547)
NetQ3_1: Q3.1 R3.2 R5.2 | length 20
  Top Layer w0.254: R5.2@107.226,112.69 112.059,112.69 113.83,110.922 R3.2@113.829,101.641
  Top Layer w0.3: R3.2@113.829,101.641 114.223,101.247 Q3.1@114.223,98.461
NetQ3_3: Q3.3 Q4.3 R2.2 R3.1 R4.1 R24.1 | length 7.5
  Top Layer w0.254: R24.1@91.359,112.572 91.358,111.42 91.866,110.912 92.882,110.912 93.263,110.531 R2.2@93.263,107.864 ; 96.258,104.648 97.274,105.664
NetQ4_1: Q4.1 R4.2 R6.1 | length 15.2
  Top Layer w0.254: R4.2@97.827,101.641 97.828,103.538 v1(98.344,104.054) ; v1(99.614,111.547) R6.1@99.623,112.69
  Top Layer w0.3: R4.2@97.827,101.641 98.094,101.374 Q4.1@98.094,98.588
  Bottom Layer w0.254: v1(98.344,104.054) 98.725,104.054 99.614,104.943 v1(99.614,111.547)
NetR5_1: R5.1 TP5.1 U8.15 | length 16.9
  Top Layer w0.254: U8.15@103.804,125.593 106.522,125.593 107.614,124.501 107.614,118.532 105.719,116.637 R5.1@105.719,112.69
NetR6_2: R6.2 TP7.1 U8.13 | length 15.2
  Top Layer w0.254: R6.2@101.13,112.69 101.13,118.029 105.709,122.608 105.709,123.866 105.252,124.323 U8.13@103.804,124.323
NetR9_2: R9.2 TP8.1 U8.12 | length 16.6
  Top Layer w0.254: v1(96.947,123.485) 96.946,123.866 97.403,124.323 U8.12@98.47,124.323 ; R9.2@98.082,112.69 v1(98.09,113.96)
  Top Layer w0.3: TP8.1@98.036,115.951 98.082,115.905 R9.2@98.082,112.69
  Bottom Layer w0.254: v1(96.947,123.485) 96.947,115.103 v1(98.09,113.96)
NetR10_1: R10.1 TP6.1 U8.14 | length 16.7
  Top Layer w0.254: R10.1@102.671,112.69 102.671,116.141 106.852,120.322 106.852,124.374 106.268,124.958 U8.14@103.804,124.958
NetR11_1: R11.1 TP14.1 U8.19 | length 49.9
  Top Layer w0.3: U8.19@103.804,128.107 123.98,128.107 125.013,127.074 R11.1@125.013,98.838
NetR11_2: R11.2 U2.3 | length 3.8
  Top Layer w0.3: R11.2@125.013,97.333 125.013,95.832 125.267,95.578 U2.3@125.268,93.627
NetR12_1: R12.1 TP13.1 U8.21 | length 52.1
  Top Layer w0.3: U8.21@103.804,129.377 124.454,129.377 126.537,127.295 R12.1@126.537,98.838
NetR12_2: R12.2 U2.2 | length 3.7
  Top Layer w0.3: U2.2@126.538,93.627 R12.2@126.537,97.333
NetR22_2: R22.2 R23.1 SW1.2 | length 75.8
  Top Layer w0.3: R22.2@115.362,124.256 116.133,124.257 116.377,124.501 116.377,125.517 116.624,125.763 118.148,125.763 v1(118.283,125.898) ; v1(129.078,125.898) 129.078,74.336 130.963,72.451 SW1.2@130.963,68.621
  Bottom Layer w0.3: v1(118.283,125.898) v1(129.078,125.898) ; SW1.2@130.963,68.621 130.963,71.4
NetR24_2: R24.2 TP4.1 U8.23 | length 27.7
  Top Layer w0.254: R24.2@91.359,114.078 91.358,119.433 91.854,119.929 100.883,119.929 102.153,121.199 102.153,130.216 102.585,130.647 U8.23@103.804,130.647
NetR28_2: R28.2 TP3.1 U8.24 | length 29.5
  Top Layer w0.254: R28.2@89.835,114.078 89.834,119.941 90.584,120.691 100.121,120.691 101.391,121.961 101.391,130.47 102.204,131.282 U8.24@103.804,131.282
TEC_OUT1: Q1.2 Q3.2 TEC1.2
  other v1: 100.957,85.09 102.227,85.09 103.497,85.09 104.64,85.09 105.783,85.09 106.926,85.09 108.069,85.09 109.339,85.09 110.482,85.09 111.625,85.09 112.768,85.09 113.911,85.09 100.957,85.979 102.227,85.979 103.497,85.979 104.64,85.979 105.783,85.979 106.926,85.979 108.069,85.979 109.339,85.979 110.482,85.979 111.625,85.979 112.768,85.979 113.911,85.979 107.942,87.122 107.942,88.011 107.942,88.9 107.942,89.789 107.942,90.678 107.942,91.567 107.942,92.329 107.942,93.218
TEC_OUT2: Q2.2 Q4.2 TEC1.1
  other v1: 85.463,85.09 86.733,85.09 88.003,85.09 89.146,85.09 90.289,85.09 91.432,85.09 92.575,85.09 93.845,85.09 94.988,85.09 96.131,85.09 97.274,85.09 98.417,85.09 85.463,85.979 86.733,85.979 88.003,85.979 89.146,85.979 90.289,85.979 91.432,85.979 92.575,85.979 93.845,85.979 94.988,85.979 96.131,85.979 97.274,85.979 98.417,85.979 91.686,87.122 91.686,88.011 91.686,88.9 91.686,89.789 91.686,90.678 91.686,91.567 91.686,92.329 91.686,93.218
VCC5V: C4.2 C5.2 C14.2 CN1.6 H1.1 R1.1 R14.1 R18.2 R21.2 R23.2 TP15.1 U1.3 U8.7 | length 175.7
  Top Layer w0.254: R23.2@117.394,124.256 117.393,120.866 v1(117.345,120.818) R14.1@120.473,120.818
  Top Layer w0.3: C14.2@94.788,127.738 96.123,127.739 96.362,127.498 U8.7@98.47,127.498
  Top Layer w0.5: C5.2@82.153,127.93 82.344,127.739 C14.2@94.788,127.738
  Top Layer w0.7: R1.1@82.333,129.708 85.135,129.708 86.532,131.105 R18.2@86.533,141.528 R21.2@94.407,141.528 ; 89.868,141.528 90.597,142.257 ; 90.596,141.529 90.596,149.139 91.358,149.901 99.994,149.901 101.432,148.463 v1(103.751,148.463) 104.145,148.463 104.871,149.189 CN1.6@104.871,150.556 ; 90.597,142.505 90.597,142.257 ; 91.328,141.528 90.597,142.257
  Top Layer w1: U1.3@82.278,122.09 82.278,125.71 C4.2@82.326,125.898 82.334,125.905 R1.1@82.333,129.708
  Bottom Layer w0.3: v1(92.071,127.738) 103.998,127.737 105.075,126.66 105.075,122.85 107.107,120.818 122.125,120.818 127.586,115.357 129.891,115.357 H1.1@130.983,115.357 134.026,115.357 135.255,116.586 135.255,128.752 124.46,139.547 124.46,149.703 127.254,152.497
  Bottom Layer w0.5: TP15.1@101.973,148.463 v1(103.751,148.463) ; v1(103.129,148.504) 103.169,148.463 v1(103.751,148.463) ; v1@103.878,148.504 103.837,148.463 v1(103.751,148.463)